# EAGLE board Lycans_circuit_protection v19 (EAGLE 9.7.0)
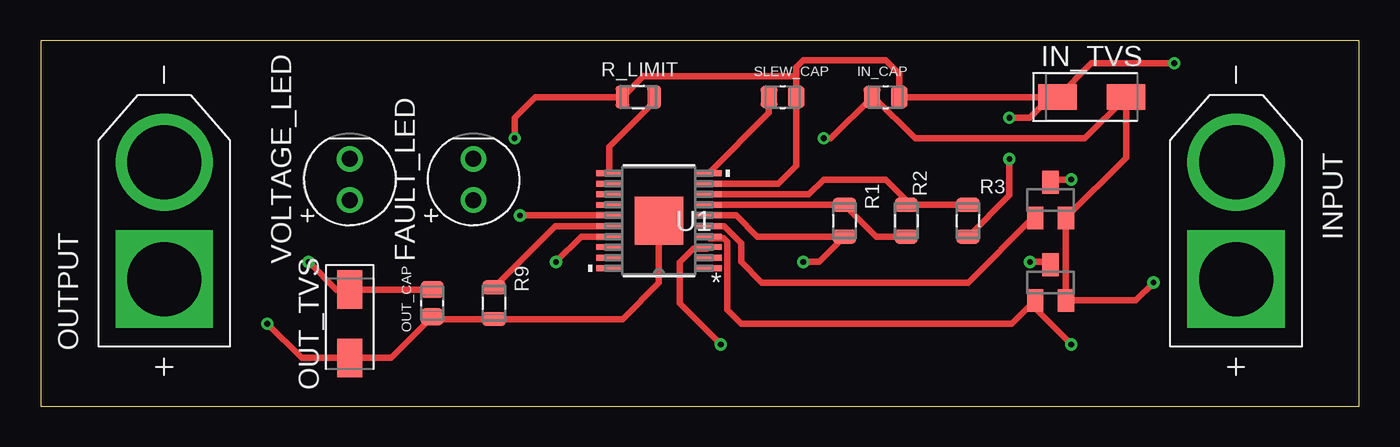
[diagram p0: board, top side]
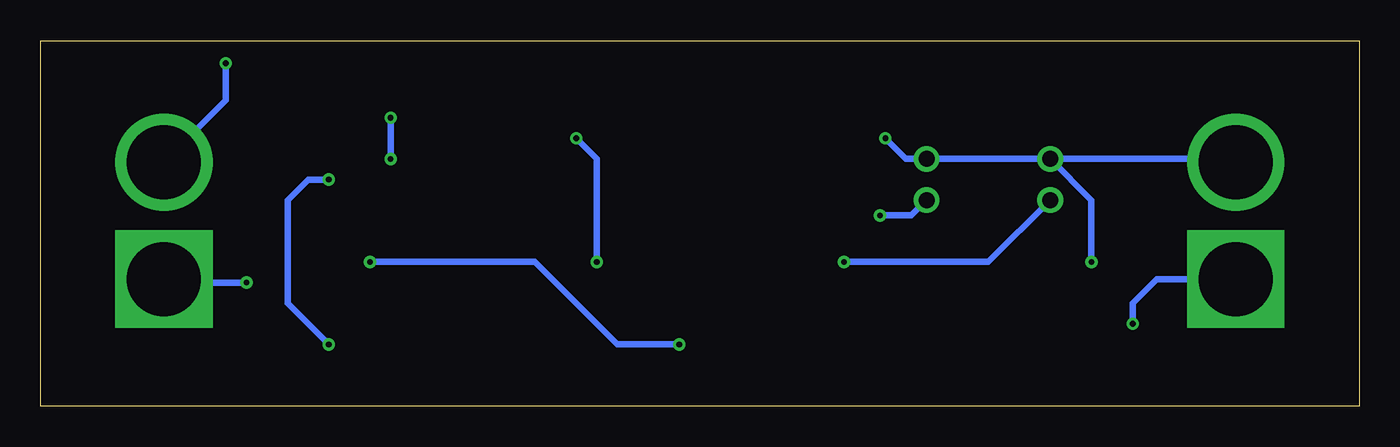
[diagram p1: board, bottom side, seen from below]

Size 81.26 x 22.53 mm. Coordinates in mm from the lower left corner, seen from the top.
Outline: 0,0 81.26,0 81.26,22.53 0,22.53 0,0
Copper layers (1*16): Top 0.035mm / dielectric 1.5mm / Bottom 0.035mm
Design rules "Fusion Electronics Design Rules": minimum track width 6mil, minimum drill 0.35mm, track to track 6mil, track to pad 6mil, pad to pad 6mil, via to via 6mil, smd to smd 6mil, copper to edge 40mil, drill to drill 6mil, minimum pad ring 10mil, minimum via ring 8mil, stop-mask expansion 4mil, vias tented up to drill 9999mil, thermal gap 10mil

## Footprints (pad centres in the part's own frame; a part is rotated, then mirrored left to right if it is on the bottom)
LEDRD254W60D565H860B_W = drill 0.981 pad 1.581: 1 -1.27,0; 2 1.27,0
CAP_0805 = smd 1.05 x 1.38: 1 -0.84,0; 2 0.84,0
DIOM5226X290N = smd 2.392 x 1.565: 1 -2.108,0; 2 2.108,0
AMASS_XT60-M = drill 4.55 pad 6: N 3.6,0 | drill 4.55 pad 6 square: P -3.6,0
SOT23 = smd 1 x 1.4: 1 -0.95,-1.1; 2 0.95,-1.1; 3 0,1.1
RES_0805 = smd 0.87 x 1.42: 1 -0.975,0; 2 0.975,0
HTSSOP20_PWP_TEX-M = smd 1.613 x 0.356: 1 -3.054,2.925; 2 -3.054,2.275; 3 -3.054,1.625; 4 -3.054,0.975; 5 -3.054,0.325; 6 -3.054,-0.325; 7 -3.054,-0.975; 8 -3.054,-1.625; 9 -3.054,-2.275; 10 -3.054,-2.925; 11 3.054,-2.925; 12 3.054,-2.275; 13 3.054,-1.625; 14 3.054,-0.975; 15 3.054,-0.325; 16 3.054,0.325; 17 3.054,0.975; 18 3.054,1.625; 19 3.054,2.275; 20 3.054,2.925 | smd 2.972 x 2.972: EPAD 0,0

## Placement (x,y rotation side)
FAULT_LED  LED_WHITE  [LEDRD254W60D565H860B_W]  26.67,13.97 90 top
IN_CAP  CC0805KRX7R9BB104  [CAP_0805]  52.07,19.05 0 top
IN_TVS  TVS_SMAJ*_DO-214AC(SMA)  [DIOM5226X290N]  64.77,19.05 0 top
INPUT  XT60-M  [AMASS_XT60-M]  73.66,11.43 90 top
OUT_CAP  CC0805KRX7R9BB104  [CAP_0805]  24.13,6.35 90 top
OUT_TVS  TVS_SMAJ*_DO-214AC(SMA)  [DIOM5226X290N]  19.05,5.08 270 top
OUTPUT  XT60-M  [AMASS_XT60-M]  7.62,11.43 90 top
Q1  NMOSFET  [SOT23]  62.23,12.7 0 top
Q2  NMOSFET  [SOT23]  62.23,7.62 0 top
R1  CRCW08050000Z0EA  [RES_0805]  49.53,11.43 270 top
R2  CRCW08050000Z0EA  [RES_0805]  53.34,11.43 270 top
R3  CRCW08050000Z0EA  [RES_0805]  57.15,11.43 90 top
R9  CRCW08050000Z0EA  [RES_0805]  27.94,6.35 270 top
R_LIMIT  CRCW08050000Z0EA  [RES_0805]  36.83,19.05 0 top
SLEW_CAP  CC0805KRX7R9BB104  [CAP_0805]  45.72,19.05 0 top
U1  TPS26636PWPRHTSSOP20_PWP_TEX-M  [HTSSOP20_PWP_TEX-M]  38.1,11.43 180 top
VOLTAGE_LED  LED_WHITE  [LEDRD254W60D565H860B_W]  19.05,13.97 90 top

## Library data of the parts
FAULT_LED VOLTAGE_LED = Tinkercad; CATEGORY: Opto-Electronic; SUB-CATEGORY: LED
IN_CAP OUT_CAP SLEW_CAP = Resistor_Capacitor; CREATED_BY: PCBLayout.com; DIGIKEY_PART_NUMBER: 311-1140-2-ND; MANUFACTURER: Yageo; MPN: CC0805KRX7R9BB104; PACKAGE: SMD 0805
IN_TVS OUT_TVS = Circuit-Protection; CATEGORY: Circuit Protection; PACKAGE_SIZE: DO-214AC; PACKAGE_TYPE: Surface Mount; SERIES: SMAJ; SUBCATEGORY: TVS Diode
INPUT OUTPUT = XT60-M; AVAILABILITY: Not in stock; CHECK_PRICES: https://www.snapeda.com/parts/XT60-M/AMASS/view-part/?ref=eda; DESCRIPTION: Plug; DC supply; XT60; male; PIN: 2; for cable; soldered; 30A; 500V; MF: AMASS; MP: XT60-M; PACKAGE: Package; PRICE: None; SNAPEDA_LINK: https://www.snapeda.com/parts/XT60-M/AMASS/view-part/?ref=snap
Q1 Q2 = Tinkercad; CATEGORY: Transistor; SUB-CATEGORY: MOSFET; TYPE: N-Channel
R1-R3 R9 R_LIMIT = Resistor_Capacitor; CREATED_BY: PCBLayout.com; DIGIKEY_PART_NUMBER: 541-0.0ATR-ND; MANUFACTURER: Vishay Dale; MPN: CRCW08050000Z0EA; PACKAGE: SMD 0805
U1 = TPS26636PWPT; COPYRIGHT: Copyright (C) 2025 Ultra Librarian. All rights reserved.; DATASHEET: https://www.ti.com/lit/gpn/tps2663; DESCRIPTION: 4.5-V to 60-V, 31mΩ, 0.6-6A eFuse with output power limiting and surge protection 20-HTSSOP -40 to 125; MANUFACTURER_NAME: Texas Instruments; MANUFACTURER_PART_NUMBER: TPS26636PWPR; TYPE: Power Management

## Nets
GND: FAULT_LED.2 IN_CAP.2 IN_TVS.1 INPUT.N OUT_CAP.2 OUT_TVS.1 OUTPUT.N R3.1 R_LIMIT.1 SLEW_CAP.2 U1.9 VOLTAGE_LED.2
IN_2: U1.1
IN_3: U1.2
N$1: IN_CAP.1 IN_TVS.2 INPUT.P Q1.2 Q2.2 R1.2 U1.6
N$2: R_LIMIT.2 U1.11
N$3: Q2.3 U1.3
N$4: SLEW_CAP.1 U1.10
N$5: Q1.1 U1.5
N$6: R1.1 R2.2 U1.7
N$7: R2.1 R3.2 U1.8
N$8: U1.20
N$9: U1.17 VOLTAGE_LED.1
N$10: FAULT_LED.1 U1.15
N$11: R9.1 U1.16
N$13: Q1.3 Q2.1 U1.4
N$14: OUT_CAP.1 OUT_TVS.2 OUTPUT.P R9.2 U1.EPAD
N$15: U1.13
OUT_2: U1.18
OUT_3: U1.19

## Tracks (layer width: path | path; a pad name or v marks a point on that pad's centre or on a via)
GND  (via drill 0.35)
  Top 0.406: U1.9 45.45,13.7 46.56,14.81 SLEW_CAP.2 46.56,20.32 | v29.21,16.51 29.21,17.78 30.48,19.05 R_LIMIT.1 37.12,20.32 46.56,20.32 | v69.85,21.14 64.75,21.14 IN_TVS.1 62.23,19.05 | 46.56,20.32 46.56,20.88 46.99,21.31 52.07,21.31 52.91,20.47 IN_CAP.2 62.23,19.05 | R3.1 59.69,13 v59.69,15.24 | v59.69,17.78 60.96,17.78 62.23,19.05 | v16.51,8.89 18.21,7.19 OUT_TVS.1 OUT_CAP.2
  Top 0.61: 62.62,19.01 IN_TVS.1
  Bottom 0.406: INPUT.N 69.85,18.84 v69.85,21.14 | VOLTAGE_LED.2 7.83,15.24 OUTPUT.N | VOLTAGE_LED.2 16.51,12.7 v16.51,8.89 | v59.69,15.24 v59.69,17.78 | v29.21,16.51 27.94,15.24 FAULT_LED.2 VOLTAGE_LED.2
N$1  (via drill 0.35)
  Top 0.406: v68.58,7.62 67.48,6.52 Q2.2 Q1.2 66.88,15.3 IN_TVS.2 64.34,16.51 53.88,16.51 51.34,19.05 IN_CAP.1 48.69,16.51 v48.26,16.51 | U1.6 42.85,11.75 44.16,10.45 R1.2 47.96,8.89 v46.99,8.89
  Top 0.61: Q2.2 63.35,6.35
  Bottom 0.406: v68.58,7.62 73.45,7.62 INPUT.P | v48.26,16.51 46.99,15.24 v46.99,8.89
N$2
  Top 0.406: U1.11 35.05,16 37.8,18.75 R_LIMIT.2
N$3  (via drill 0.35)
  Top 0.406: v60.96,8.89 62.06,8.89 | U1.3 41.04,9.69 40.2,9.69 39.37,8.86 39.37,6.35 v41.91,3.81
  Top 0.61: 62.06,8.89 Q2.3
  Bottom 0.406: v41.91,3.81 45.72,3.81 50.8,8.89 v60.96,8.89
N$4
  Top 0.406: U1.10 44.88,18.08 SLEW_CAP.1
N$5
  Top 0.406: Q1.1 61.13,11.6 57.15,7.62 44.45,7.62 43.18,8.89 43.18,10.06 42.13,11.11 U1.5
N$6
  Top 0.406: R1.1 49.44,12.31 | R2.2 51.48,10.45 R1.1 | U1.7 R1.1
N$7
  Top 0.406: R3.2 R2.1 53.34,12.7 52.07,13.97 48.26,13.97 47.34,13.06 U1.8
N$9  (via drill 0.35)
  Top 0.406: v31.75,8.89 33.31,10.45 U1.17
  Bottom 0.406: VOLTAGE_LED.1 22.86,8.89 v31.75,8.89
N$10  (via drill 0.35)
  Top 0.406: U1.15 v29.54,11.75
  Bottom 0.406: v29.54,11.75 27.61,11.75 FAULT_LED.1
N$11
  Top 0.406: U1.16 31.72,11.11 R9.1
N$13  (via drill 0.35)
  Top 0.406: Q1.3 62.4,13.97 v63.5,13.97 | 60.96,6.2 Q2.1 | Q2.1 59.84,5.08 43.18,5.08 42.32,5.94 42.32,10.13 42.08,10.36 41.24,10.36 U1.4 | Q2.1 61.28,6.03 v63.5,3.81
  Top 0.61: 62.23,13.97 Q1.3
  Bottom 0.406: v63.5,13.97 64.77,13.97 66.04,12.7 66.04,6.35 v63.5,3.81
N$14  (via drill 0.35)
  Top 0.406: U1.EPAD 38.1,7.62 35.85,5.38 R9.2 24.26,5.38 OUT_CAP.1 21.59,2.97 OUT_TVS.2 16.08,2.97 v13.97,5.08
  Bottom 0.406: v13.97,5.08 13.97,6.35 12.49,7.83 OUTPUT.P